# EAGLE board Gen7AdapterBoard (EAGLE 6.3)
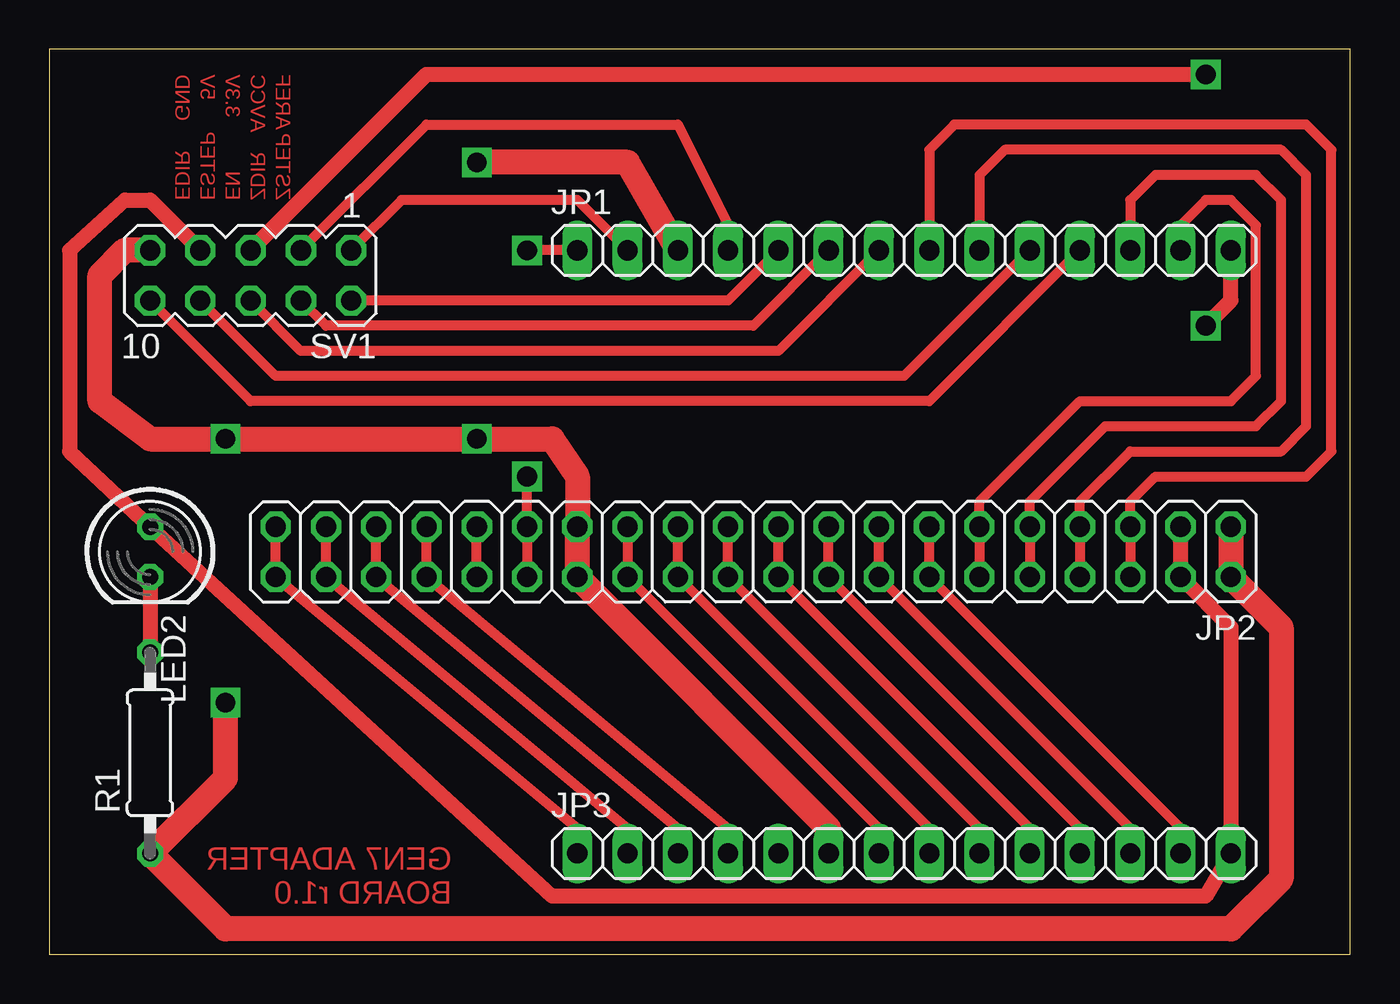
[diagram p0: board, top side]
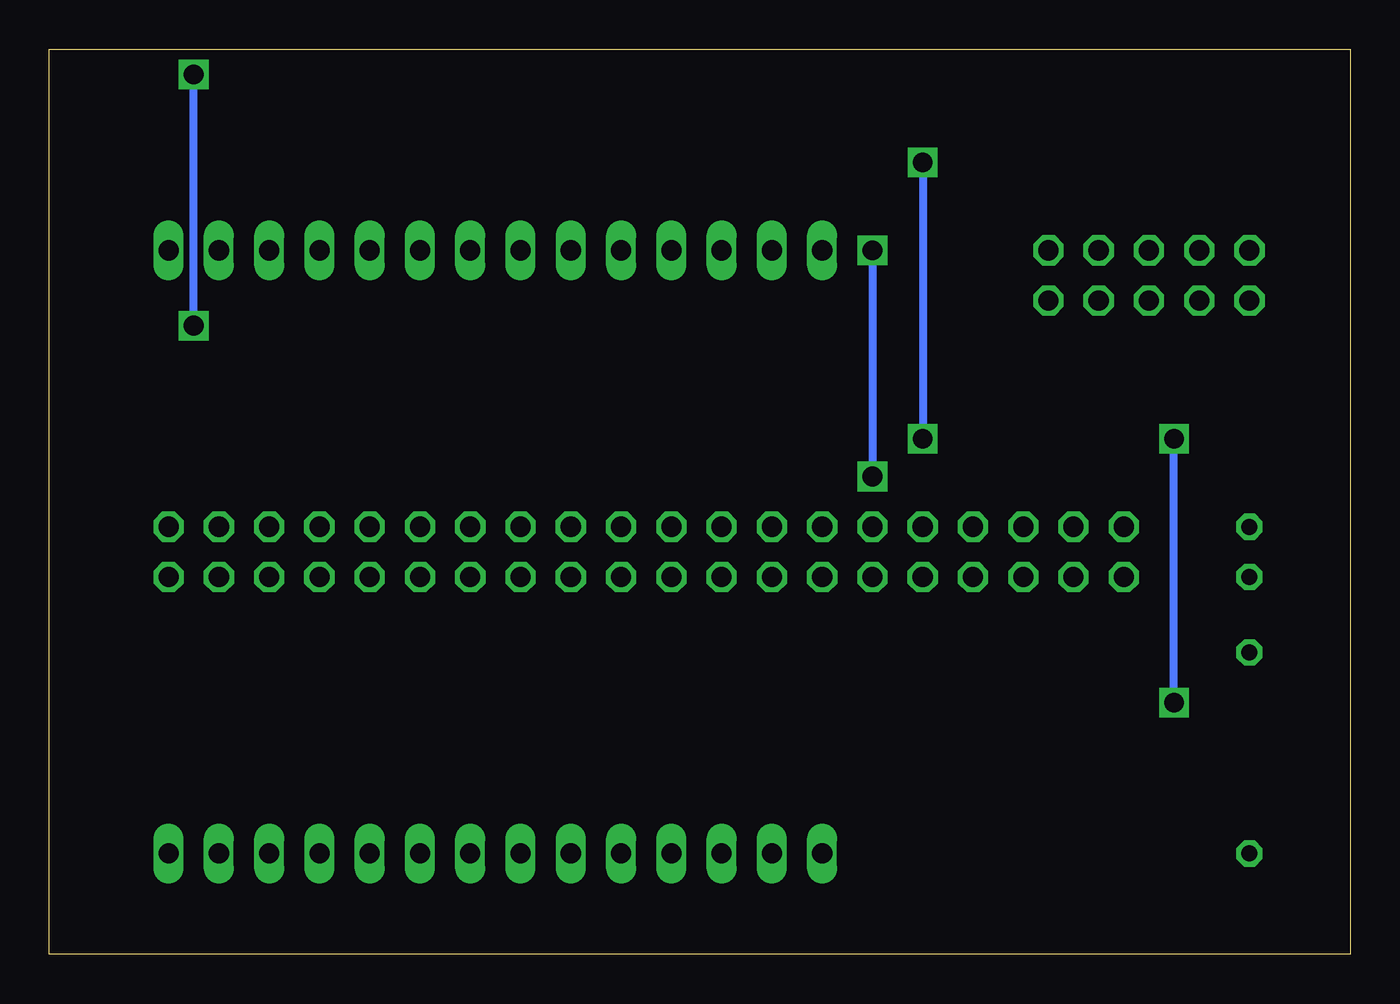
[diagram p1: board, bottom side, seen from below]

Size 65.71 x 45.71 mm. Coordinates in mm from the lower left corner, seen from the top.
Outline: 0,0 65.71,0 65.71,45.71 0,45.71 0,0
Copper layers (1*16): Top 0.035mm / dielectric 1.5mm / Bottom 0.035mm
Design rules "default": minimum track width 10mil, minimum drill 24mil, track to track 8mil, track to pad 8mil, pad to pad 8mil, via to via 8mil, smd to smd 8mil, copper to edge 40mil, drill to drill 8mil, minimum pad ring 10mil, minimum via ring 8mil, stop-mask expansion 4mil, vias tented up to drill 0mil, thermal gap 10mil

## Footprints (pad centres in the part's own frame; a part is rotated, then mirrored left to right if it is on the bottom)
1X14 = drill 1.016 long: 1 -16.51,0; 2 -13.97,0; 3 -11.43,0; 4 -8.89,0; 5 -6.35,0; 6 -3.81,0; 7 -1.27,0; 8 1.27,0; 9 3.81,0; 10 6.35,0; 11 8.89,0; 12 11.43,0; 13 13.97,0; 14 16.51,0
2X20 = drill 1.016 octagon: 1 -24.13,-1.27; 2 -24.13,1.27; 3 -21.59,-1.27; 4 -21.59,1.27; 5 -19.05,-1.27; 6 -19.05,1.27; 7 -16.51,-1.27; 8 -16.51,1.27; 9 -13.97,-1.27; 10 -13.97,1.27; 11 -11.43,-1.27; 12 -11.43,1.27; 13 -8.89,-1.27; 14 -8.89,1.27; 15 -6.35,-1.27; 16 -6.35,1.27; 17 -3.81,-1.27; 18 -3.81,1.27; 19 -1.27,-1.27; 20 -1.27,1.27; 21 1.27,-1.27; 22 1.27,1.27; 23 3.81,-1.27; 24 3.81,1.27; 25 6.35,-1.27; 26 6.35,1.27; 27 8.89,-1.27; 28 8.89,1.27; 29 11.43,-1.27; 30 11.43,1.27; 31 13.97,-1.27; 32 13.97,1.27; 33 16.51,-1.27; 34 16.51,1.27; 35 19.05,-1.27; 36 19.05,1.27; 37 21.59,-1.27; 38 21.59,1.27; 39 24.13,-1.27; 40 24.13,1.27
LED5MM = drill 0.813 octagon: A -1.27,0; K 1.27,0
0207/10 = drill 0.813 octagon: 1 -5.08,0; 2 5.08,0
MA05-2 = drill 1.016 octagon: 1 -5.08,-1.27; 2 -5.08,1.27; 3 -2.54,-1.27; 4 -2.54,1.27; 5 0,-1.27; 6 0,1.27; 7 2.54,-1.27; 8 2.54,1.27; 9 5.08,-1.27; 10 5.08,1.27

## Placement (x,y rotation side)
JP1  [1X14]  43.18,35.56 0 top
JP2  [2X20]  35.56,20.32 180 top
JP3  [1X14]  43.18,5.08 0 top
LED2  [LED5MM]  5.08,20.32 270 top
R1  [0207/10]  5.08,10.16 90 top
SV1  [MA05-2]  10.16,34.29 180 top

## Library data of the parts
JP1-JP3 = pinhead
LED2 = led
R1 = resistor
SV1 = con-lstb; OC_FARNELL: unknown; OC_NEWARK: unknown

## Nets
+5V: JP2.3 JP2.4 JP3.14 LED2.A SV1.7
GND: JP1.3 JP2.1 JP2.2 JP2.27 JP2.28 JP3.6 R1.1 SV1.9
N$1: LED2.K R1.2
N$2: JP1.7 SV1.6
N$3: JP1.14 SV1.5
N$4: JP1.8 JP2.5 JP2.6
N$5: JP1.9 JP2.7 JP2.8
N$8: JP2.13 JP2.14 JP3.13
N$9: JP2.15 JP2.16 JP3.12
N$10: JP2.17 JP2.18 JP3.11
N$11: JP2.19 JP2.20 JP3.10
N$12: JP2.21 JP2.22 JP3.9
N$13: JP2.23 JP2.24 JP3.8
N$14: JP2.25 JP2.26 JP3.7
N$15: JP1.11 SV1.10
N$16: JP1.1 JP2.29 JP2.30
N$17: JP2.31 JP2.32
N$18: JP2.33 JP2.34 JP3.4
N$19: JP2.35 JP2.36 JP3.3
N$20: JP2.37 JP2.38 JP3.2
N$21: JP2.39 JP2.40 JP3.1
N$22: JP1.10 SV1.8
N$23: JP1.6 SV1.4
N$24: JP1.5 SV1.2
N$25: JP1.2 SV1.1
N$27: JP1.4 SV1.3
N$28: JP1.12 JP2.9 JP2.10
N$29: JP1.13 JP2.11 JP2.12

## Tracks (layer width: path | path; a pad name or v marks a point on that pad's centre or on a via)
+5V
  Top 0.762: SV1.7 5.08,38.1 3.81,38.1 1.02,35.56 1.02,25.4 LED2.A 25.4,2.92 58.42,2.92 JP3.14 59.69,16.51 JP2.4 JP2.3
GND  (via drill 1)
  Top 1.27: JP2.1 JP2.2 62.23,16.51 62.23,3.81 59.69,1.27 8.89,1.27 R1.1 8.89,8.89 v8.89,12.7 | JP3.6 39.37,6.35 JP2.28 JP2.27 26.67,24.13 25.4,26.04 v21.59,26.04 v8.89,26.04 5.08,26.04 2.54,27.94 2.54,34.29 3.81,35.56 SV1.9 | JP1.3 29.21,40.01 v21.59,40.01
  Bottom 0.406: v21.59,40.01 v21.59,26.04 | v8.89,12.7 v8.89,26.04
N$1
  Top 0.762: LED2.K R1.2
N$2
  Top 0.508: SV1.6 12.7,30.48 36.83,30.48 JP1.7
N$3  (via drill 1)
  Top 0.762: SV1.5 19.05,44.45 v58.42,44.45 | v58.42,31.75 59.69,33.02 JP1.14
  Bottom 0.406: v58.42,31.75 v58.42,44.45
N$4
  Top 0.508: JP2.6 JP2.5 54.61,22.86 55.88,24.13 63.5,24.13 64.77,25.4 64.77,40.64 63.5,41.91 45.72,41.91 44.45,40.64 JP1.8
N$5
  Top 0.508: JP2.8 JP2.7 52.07,22.86 54.61,25.4 62.23,25.4 63.5,26.67 63.5,39.37 62.23,40.64 48.26,40.64 46.99,39.37 JP1.9
N$8
  Top 0.508: JP3.13 57.15,6.35 JP2.14 JP2.13
N$9
  Top 0.508: JP3.12 54.61,6.35 JP2.16 JP2.15
N$10
  Top 0.508: JP3.11 52.07,6.35 JP2.18 JP2.17
N$11
  Top 0.508: JP3.10 49.53,6.35 JP2.20 JP2.19
N$12
  Top 0.508: JP3.9 46.99,6.35 JP2.22 JP2.21
N$13
  Top 0.508: JP3.8 44.45,6.35 JP2.24 JP2.23
N$14
  Top 0.508: JP2.25 JP2.26 41.91,6.35 JP3.7
N$15
  Top 0.508: SV1.10 10.16,27.94 44.45,27.94 JP1.11
N$16  (via drill 1)
  Top 0.508: JP2.30 JP2.29 v24.13,24.13 | JP1.1 v24.13,35.56
  Bottom 0.406: v24.13,35.56 v24.13,24.13
N$17
  Top 0.508: JP2.32 JP2.31
N$18
  Top 0.508: JP3.4 34.29,6.35 JP2.34 JP2.33
N$19
  Top 0.508: JP3.3 31.75,6.35 JP2.36 JP2.35
N$20
  Top 0.508: JP3.2 29.21,6.35 JP2.38 JP2.37
N$21
  Top 0.508: JP2.39 JP2.40 26.67,6.35 JP3.1
N$22
  Top 0.508: SV1.8 11.43,29.21 43.18,29.21 JP1.10
N$23
  Top 0.508: SV1.4 13.97,31.75 35.56,31.75 JP1.6
N$24
  Top 0.508: SV1.2 34.29,33.02 JP1.5
N$25
  Top 0.508: SV1.1 17.78,38.1 26.67,38.1 JP1.2
N$27
  Top 0.508: SV1.3 19.05,41.91 31.75,41.91 34.29,36.83 JP1.4
N$28
  Top 0.508: JP2.10 JP2.9 49.53,22.86 53.34,26.67 60.96,26.67 62.23,27.94 62.23,38.1 60.96,39.37 55.88,39.37 54.61,38.1 JP1.12
N$29
  Top 0.508: JP2.12 JP2.11 46.99,22.86 52.07,27.94 59.69,27.94 60.96,29.21 60.96,36.83 59.69,38.1 58.42,38.1 57.15,36.83 JP1.13

## Text on the board
Top: GND | 5V | 3.3V | AVCC | AREF | EDIR | ESTEP | EN | ZDIR | ZSTEP | GEN7 ADAPTER / BOARD r1.0